# EAGLE board Xbeetrans (EAGLE 6.2)
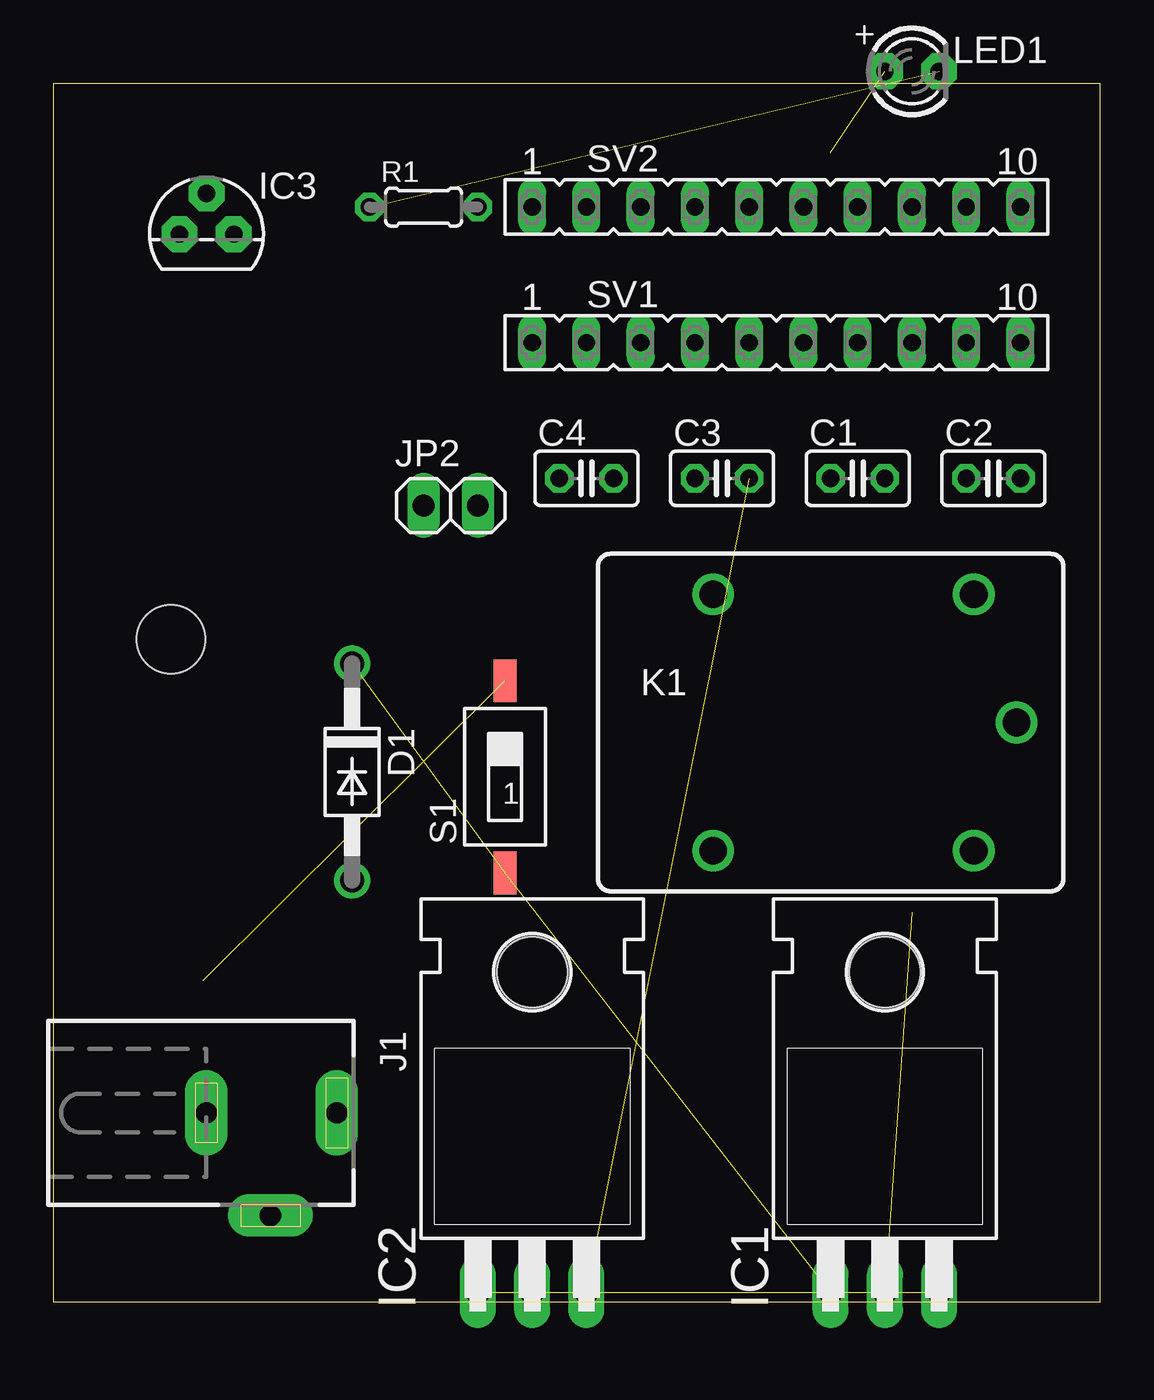
[diagram p0: board, top side]
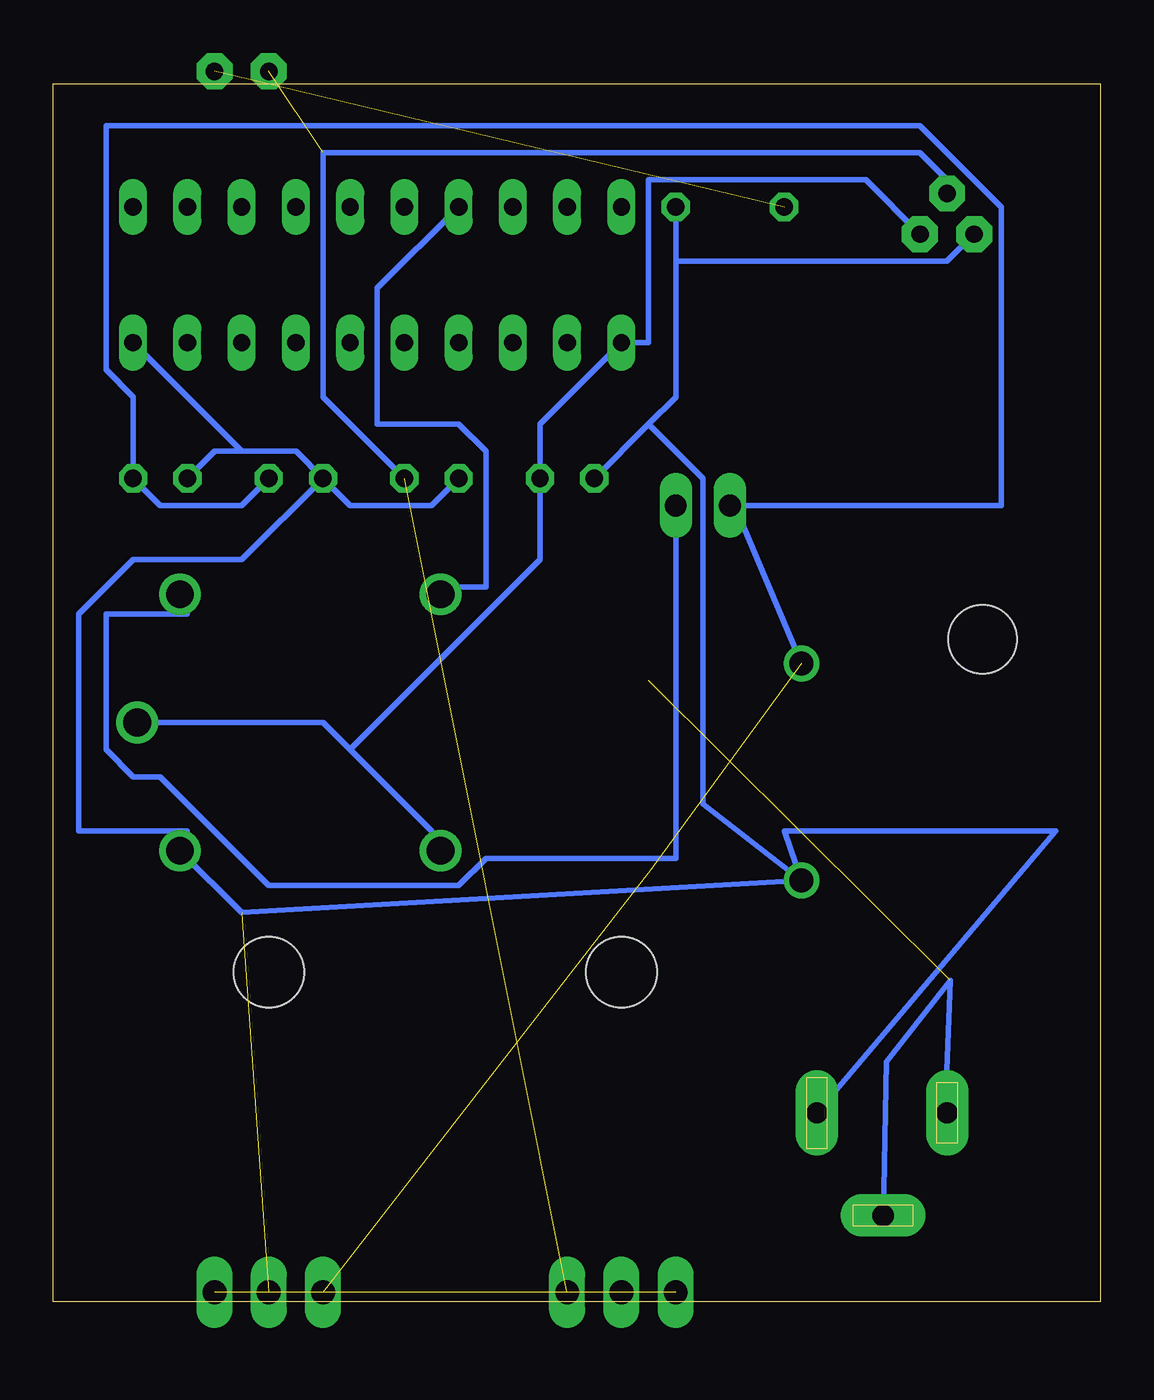
[diagram p1: board, bottom side, seen from below]

Size 49 x 57 mm. Coordinates in mm from the lower left corner, seen from the top.
Outline: 0,0 49,0 49,57 0,57 0,0
Copper layers (1*16): Top 0.035mm / dielectric 1.5mm / Bottom 0.035mm
Design rules: minimum track width 10mil, minimum drill 24mil, track to track 8mil, track to pad 8mil, pad to pad 8mil, via to via 8mil, smd to smd 8mil, copper to edge 40mil, drill to drill 8mil, minimum pad ring 10mil, minimum via ring 8mil, stop-mask expansion 4mil, vias tented up to drill 0mil, thermal gap 10mil
Holes 3.2 mm at 5.5,31

## Footprints (pad centres in the part's own frame; a part is rotated, then mirrored left to right if it is on the bottom)
C025-025X050 = drill 0.813 octagon: 1 -1.27,0; 2 1.27,0
DO41-10 = drill 1.118: A 5.08,0; C -5.08,0
TO220H = drill 1.118 long: 1 -2.54,-10.16; 2 0,-10.16; 3 2.54,-10.16 | hole 3.302: 0,4.826
TO92 = drill 0.813 pad 1.676 octagon: 1 -1.27,0; 2 0,1.905; 3 1.27,0
DCJ0202 = drill 1 pad 2 long: 1 0,3.1; 2 4.8,0; 3 0,-3
1X02 = drill 1.016 long: 1 -1.27,0; 2 1.27,0
JS-M = drill 1.3: 1 6.7,6; 2 6.7,-6; C 8.7,0; NC -5.5,-6; NO -5.5,6
LED3MM = drill 0.813 pad 1.676 octagon: A -1.27,0; K 1.27,0
0204/5 = drill 0.813 octagon: 1 -2.54,0; 2 2.54,0
SMS-001 = smd 1.092 x 2.007: 1 0,-4.496; 2 0,4.496
FE10 = drill 0.813 long: 1 -11.43,0; 2 -8.89,0; 3 -6.35,0; 4 -3.81,0; 5 -1.27,0; 6 1.27,0; 7 3.81,0; 8 6.35,0; 9 8.89,0; 10 11.43,0

## Placement (x,y rotation side)
C1  22uF  [C025-025X050]  37.65,38.53 0 top
C2  100nF  [C025-025X050]  44,38.53 0 top
C3  1uF  [C025-025X050]  31.3,38.53 0 top
C4  1uF  [C025-025X050]  24.95,38.53 0 top
D1  1N4004  [DO41-10]  13.98,24.79 270 top
IC1  7805T  [TO220H]  38.92,10.59 0 top
IC2  7805T  [TO220H]  22.41,10.59 0 top
IC3  [TO92]  7.17,49.96 0 top
J1  DCJ0202  [DCJ0202]  10.16,8.83 270 top
JP2  [1X02]  18.6,37.26 0 top
K1  JS-M1-9V-4  [JS-M]  36.38,27.1 0 top
LED1  [LED3MM]  40.19,57.58 0 top
R1  330  [0204/5]  17.33,51.23 0 top
S1  SWS001  [SMS-001]  21.14,24.56 0 top
SV1  [FE10]  33.84,44.88 0 top
SV2  [FE10]  33.84,51.23 0 top

## Library data of the parts
C1-C4 R1 = rcl
D1 = diode
IC1-IC3 LED1 = adafruit
J1 = con-jack; OC_FARNELL: unknown; OC_NEWARK: unknown
JP2 = pinhead
K1 = relay; OC_FARNELL: unknown; OC_NEWARK: unknown
S1 = smd-special
SV1 SV2 = con-lsta; OC_FARNELL: unknown; OC_NEWARK: unknown

## Nets
GND: C1.1 C2.1 C3.1 C4.1 D1.A IC1.2 IC2.2 IC3.1 J1.1 K1.2 R1.2 SV1.10
N$1: J1.2 J1.3 S1.2
N$3: C1.2 C2.2 D1.C IC1.1 JP2.1 S1.1
N$6: JP2.2 K1.1
N$7: LED1.K R1.1
N$8: C3.2 IC2.3 IC3.2 LED1.A
N$10: IC1.3 IC2.1
XBEE3.3: C4.2 IC3.3 K1.C K1.NC SV1.1
XBEED: K1.NO SV2.4

## Tracks (layer width: path | path; a pad name or v marks a point on that pad's centre or on a via)
GND  (2 unrouted)
  Bottom 0.254: 21.14,41.07 19.87,42.34 19.87,48.69 | 21.14,41.07 C4.1 | R1.2 19.87,48.69 | IC3.1 7.17,48.69 19.87,48.69 | C3.1 31.3,37.26 35.11,37.26 C1.1 | C2.1 41.46,39.8 40.19,39.8 | 40.19,39.8 37.65,39.8 C1.1 | 40.19,39.8 SV1.10 | D1.A 14.79,22.02 2.09,22.02 J1.1 | D1.A 40.19,18.21 K1.2 42.73,22.02 47.81,22.02 47.81,32.18 45.27,34.72 40.19,34.72 C1.1 | 21.14,41.07 18.6,38.53 18.6,23.29 D1.A
N$1  (1 unrouted)
  Bottom 0.254: J1.2 10.01,11.21 7.01,15.02 7.24,9.02 J1.3
N$3  (2 unrouted)
  Bottom 0.254: C1.2 40.19,37.26 44,37.26 C2.2 45.27,42.34 46.54,43.61 46.54,55.04 8.44,55.04 4.63,51.23 4.63,37.26 JP2.1 17.13,37.56 17.13,37.29 D1.C
N$6
  Bottom 0.254: JP2.2 19.87,20.75 28.76,20.75 30.03,19.48 38.92,19.48 44,24.56 45.27,24.56 46.54,25.83 46.54,32.18 42.73,32.18 K1.1
N$7  (1 unrouted)
N$8  (2 unrouted)
  Bottom 0.254: C3.2 36.38,42.34 36.38,53.77 8.44,53.77 7.17,52.5 IC3.2
N$10  (1 unrouted)
XBEE3.3
  Bottom 0.254: 35.11,25.83 36.38,27.1 K1.C 45.27,27.1 | 35.11,25.83 31.3,22.02 K1.NC | IC3.3 10.98,52.5 21.14,52.5 21.14,44.88 SV1.1 26.22,41.07 C4.2 26.22,34.72 35.11,25.83
XBEED
  Bottom 0.254: SV2.4 33.84,47.42 33.84,41.07 30.03,41.07 28.76,39.8 28.76,33.45 30.03,33.45 K1.NO